# Altium PCB BT100_V1.1.PCBDOC
Units mm, origin at the board's own origin, x right, y up, seen from the top; angles counter-clockwise.
Board outline 126.04 x 85.33 mm, 4 copper layers (Top Layer, GND, POWER, Bottom Layer); 82 components, 62 nets, 257 pads, 111 vias.
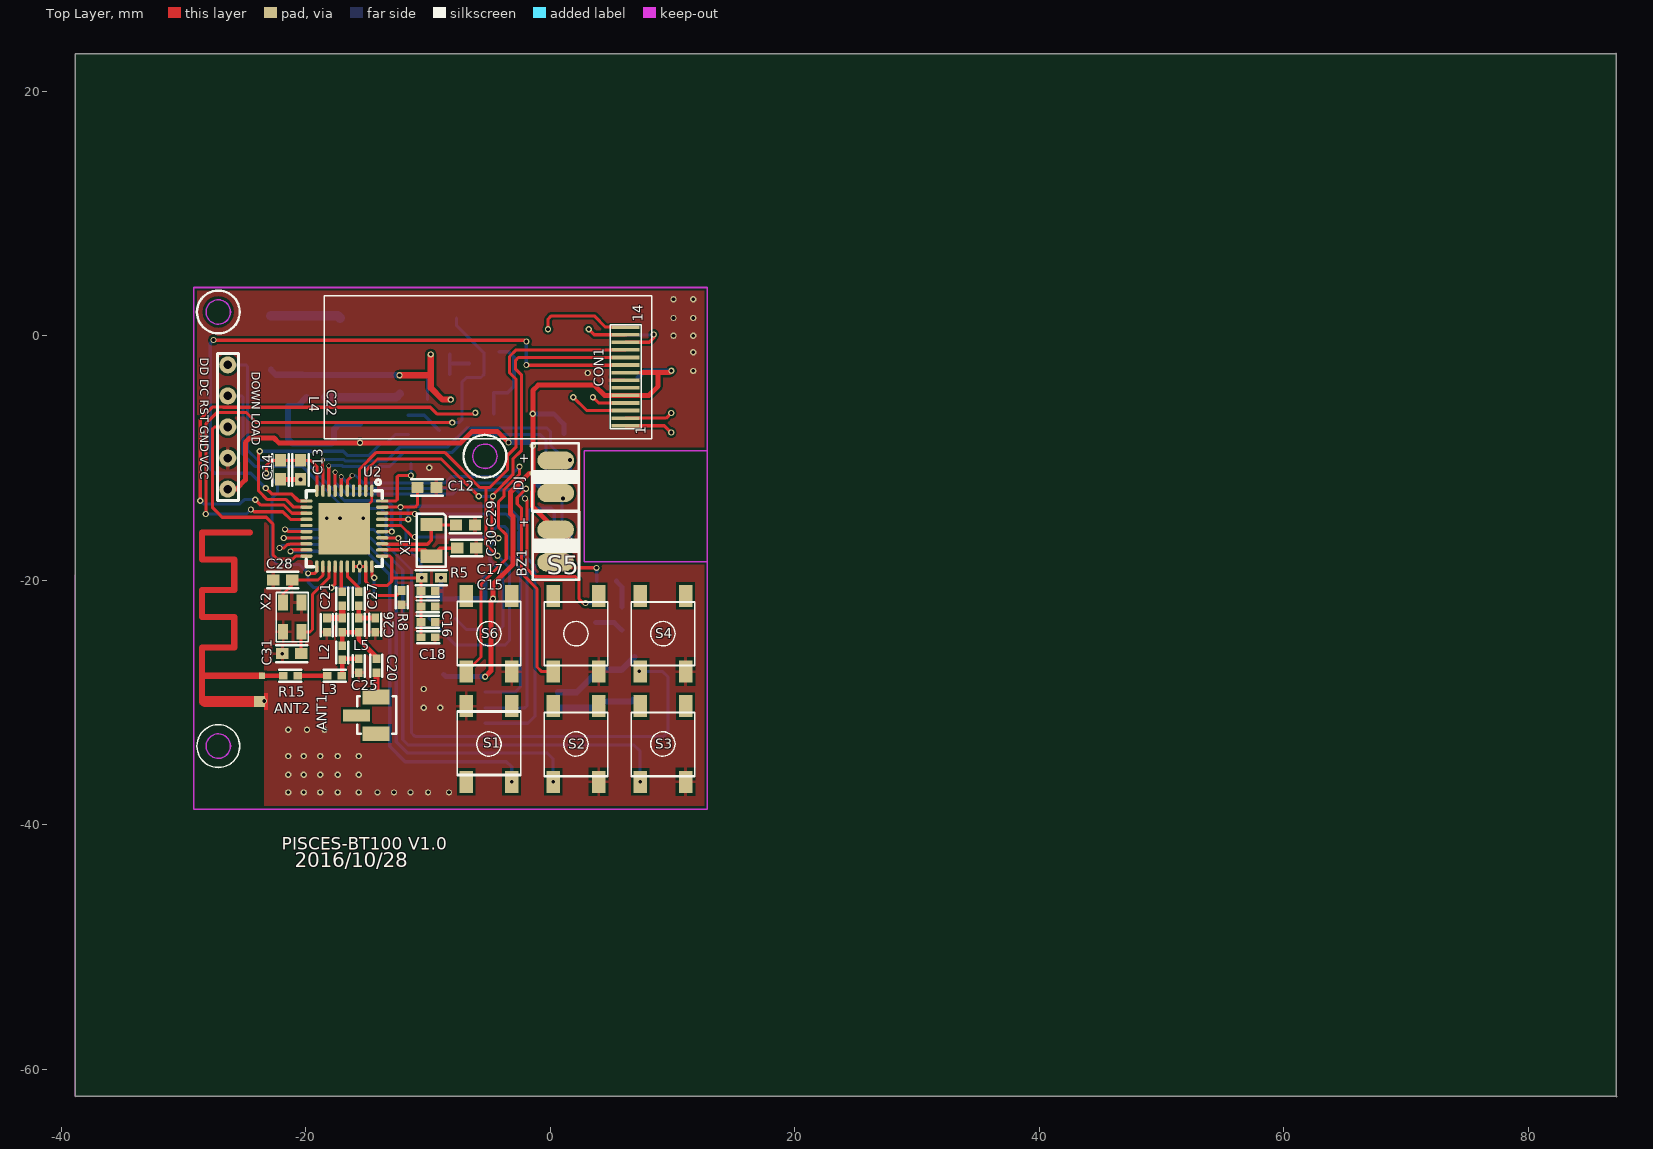
[diagram p0: Top Layer view]
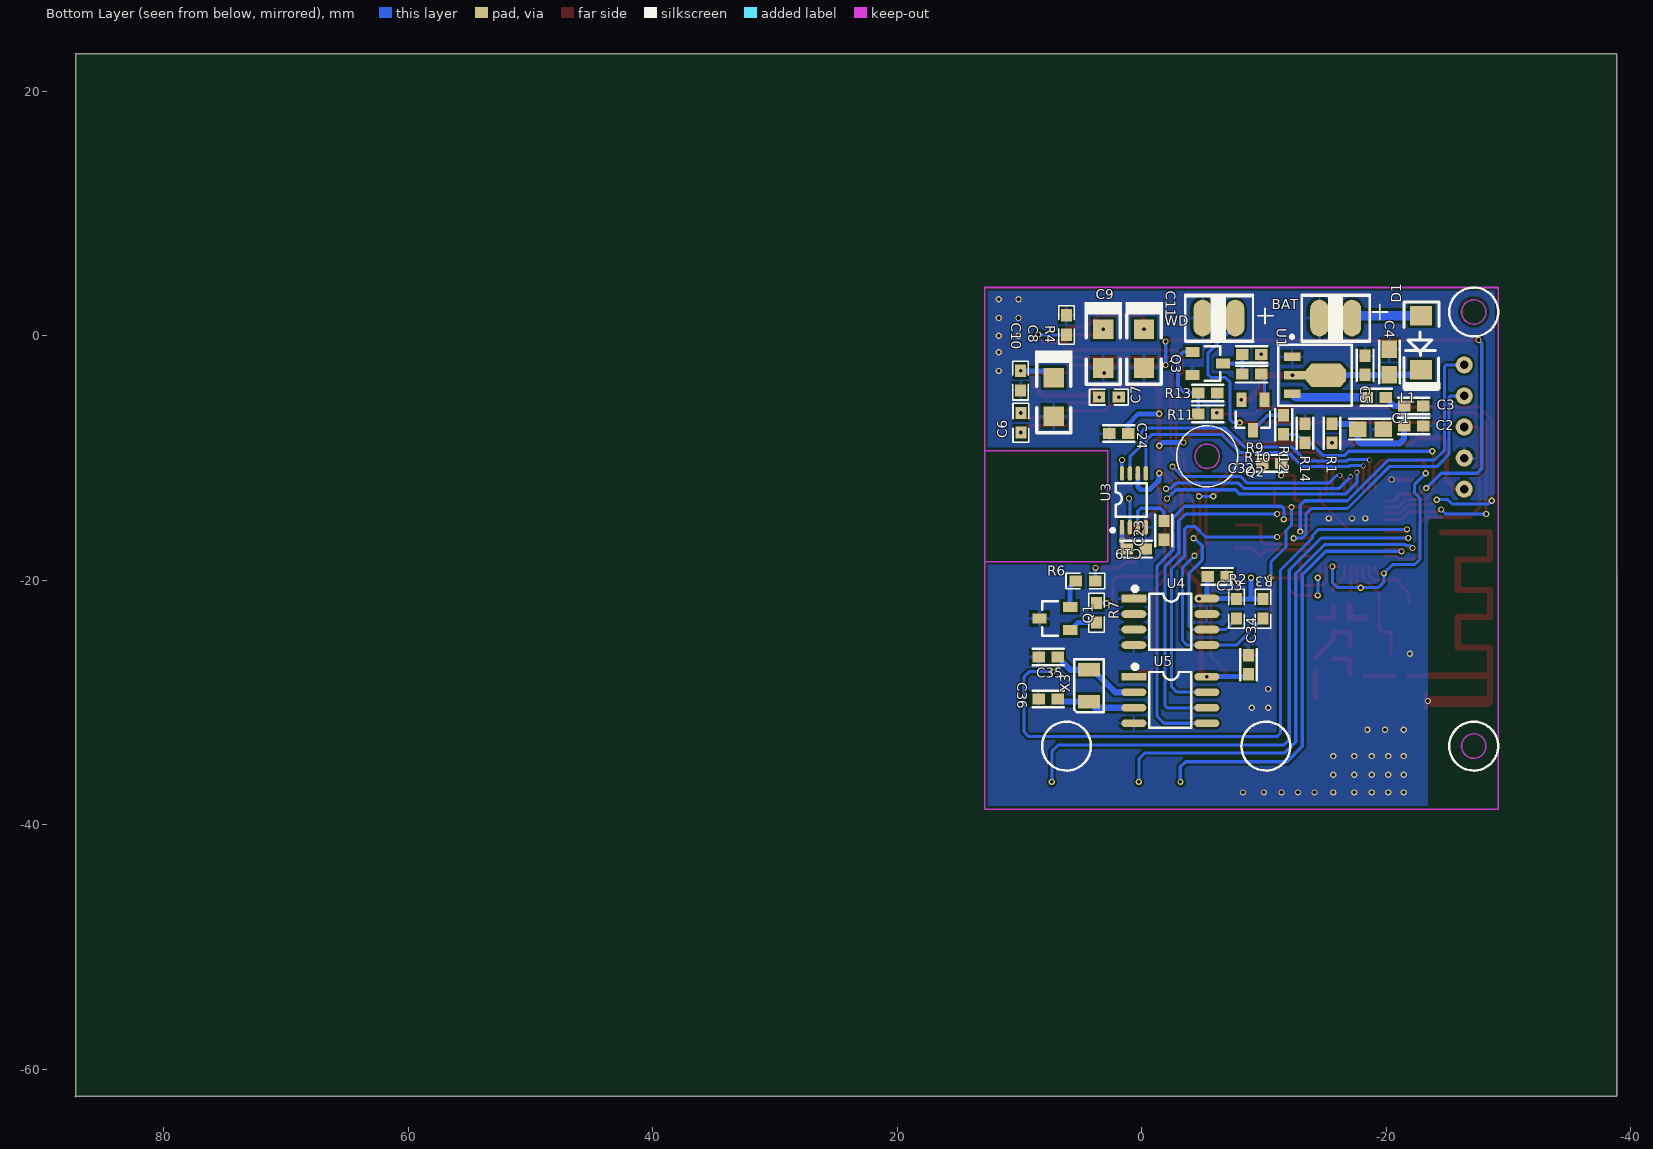
[diagram p1: Bottom Layer view, seen from below]

## Layer stack, top to bottom
Top Solder: solder mask 0.0102, Solder Resist, Dk 3.5
Top Layer: signal copper 0.0356
Dielectric1: core 0.32, FR-4, Dk 4.8
GND: signal copper 0.0356
Dielectric2: prepreg 0.32, FR-4, Dk 4.8
POWER: signal copper 0.0356
Dielectric3: core 0.32, FR-4, Dk 4.8
Bottom Layer: signal copper 0.0356
Bottom Solder: solder mask 0.0102, Solder Resist, Dk 3.5

## Board outline
-38.826,-62.183 -38.826,23.037 87.104,23.037 87.154,23.087 87.174,23.067 87.174,9.757 87.174,-62.213 87.204,-62.243 87.164,-62.203 -38.836,-62.203

## Design rules (kind name [scope] priority, off if disabled: settings)
Clearance [All] p1: gap=0.2
ComponentClearance [All] p1 off: gap=0.254 collisioncheckmode=3 verticalgap=0.254 showdistances=FALSE
FabricationTestPointUsage TestPointUsage [All] p1: valid=0 allowmultiple=FALSE
FabricationTestpoint Testpoint [(IsPad And (OnTopLayer Or OnBottomLayer))] p1: side=3 testpointundercomponent=TRUE minsize=1.016 maxsize=2.54 preferedsize=1.524 minholesize=0 maxholesize=1.016 preferedholesize=0.813 testpointgrid=0.025 allowsidetop=TRUE allowsidebottom=TRUE usegrid=TRUE gridtolerance=0
Height [All] p1 off: minheight=0 maxheight=25.4 prefheight=12.7
PolygonConnect PolygonConnect_1 [IsVia] p1: connectstyle=Direct reliefconductorwidth=0.254 reliefentries=4 polygonreliefangle="90 Angle" airgapwidth=0.254
PolygonConnect [All] p2: connectstyle=Relief reliefconductorwidth=0.254 reliefentries=4 polygonreliefangle="90 Angle" airgapwidth=0.254
RoomDefinition BT100_V1.1 [InComponentClass('BT100_V1.1')] p1: confinementstyle=ConfineIn formatcopy=TRUE lockcomponents=FALSE outline -67.875,-186.955 -17.075,-186.955 -17.075,-161.555 -67.875,-161.555
RoutingVias [All] p1: holewidth=0.4 width=0.7 viastyle="Through Hole" minholewidth=0.2 minwidth=0.2 maxholewidth=0.711 maxwidth=1.27
SolderMaskExpansion [All] p1: expansion=0.102
UnpouredPolygon [All] p1: allowunpoured=FALSE
Width [All] p1: maxlimit=1 minlimit=0.2 preferedwidth=0.28 midlayer1_minwidth=0.254 midlayer1_maxwidth=0.254 midlayer1_prefwidth=0.254 midlayer2_minwidth=0.254 midlayer2_maxwidth=0.254 midlayer2_prefwidth=0.254 minimp=50.000000 maximp=50.000000 favimp=50.000000
25 further rules are at their usual default settings.

## Components (designator, comment, footprint, x,y, rotation, side; value= is the part's Value field where it differs from the comment)
ANT1 "ANT" IPEX -15.84,-31.05 r180 top
ANT2 "ANT" ANT -23.58,-27.81 r90 top
BAT "CN1" 2PAD-9 -17.19,1.44 r0 bottom
BZ1 "BUZZER" 2PAD-9 0.445,-15.863 r270 top
C1 "10uf/10V,0805" PC5-*****-**-0A_0805_TDK -18.72,-7.65 r0 bottom
C2 "0.1uf" PC5-*****-**-0A_0603_TDK -22.23,-7.38 r0 bottom
C3 "2.2uf" PC5-*****-**-0A_0603_TDK -22.23,-5.76 r180 bottom
C4 "10uf/10V,0805" PC5-*****-**-0A_0805_TDK -20.25,-2.16 r270 bottom
C5 "0.1uf" PC5-*****-**-0A_0603_TDK -18.27,-2.43 r270 bottom
C6 "1UF" 0603 9.9,-7.92 r90 bottom
C7 "1UF" 0603 1.89,-5.04 r0 bottom
C8 "4.7UF" 3216C 7.196,-3.417 r90 bottom
C9 "4.7uf" 3216C 3.15,0.54 r90 bottom
C10 "1uf" 0603 9.9,-2.88 r270 bottom
C11 "4.7uF" 3216C -0.18,0.54 r90 bottom
C12 "1uf" PC5-*****-**-0A_0603_TDK -10.08,-12.42 r0 top
C13 "0.1uf" PC7-*****-KO-0A_0603_TDK -20.43,-10.98 r270 top
C14 "0.1uf" PC5-*****-**-0A_0603_TDK -22.05,-10.98 r270 top
C15 "0.1uf" PC7-*****-KQA0A_0402_YAGEO -9.99,-22.14 r0 top
C16 "0.1uf" PC7-*****-KQA0A_0402_YAGEO -9.99,-23.4 r0 top
C17 "0.1uf" PC7-*****-KQA0A_0402_YAGEO -9.99,-20.88 r0 top
C18 "220pf" PC7-*****-KQA0A_0402_YAGEO -9.99,-24.66 r180 top
C19 "1uf" PC5-*****-**-0A_0603_TDK 0.45,-17.46 r0 bottom
C20 "20P" PC7-*****-KQA0A_0402_YAGEO -14.22,-27 r270 top
C21 "18p" PC7-*****-KQA0A_0402_YAGEO -17.01,-21.51 r270 top
C22 "1p" PC7-*****-KQA0A_0402_YAGEO -17.01,-23.67 r270 top
C23 "1uf" PC5-*****-**-0A_0603_TDK -1.8,-15.93 r90 bottom
C24 "0.1uf" PC5-*****-**-0A_0603_TDK 1.89,-8.01 r180 bottom
C25 "1p" PC7-*****-KQA0A_0402_YAGEO -15.66,-27 r90 top
C26 "1p" PC7-*****-KQA0A_0402_YAGEO -14.31,-23.67 r270 top
C27 "18p" PC7-*****-KQA0A_0402_YAGEO -15.66,-21.51 r270 top
C28 "27p" PC7-*****-KO-0A_0603_TDK -21.87,-19.98 r0 top
C29 "15P" PC5-*****-**-0A_0603_TDK -6.93,-15.48 r180 top
C30 "15P" PC7-*****-KO-0A_0603_TDK -6.84,-17.37 r180 top
C31 "27p" PC7-*****-KO-0A_0603_TDK -21.15,-26.01 r0 top
C32 "1uf" PC5-*****-**-0A_0603_TDK -10.62,-10.44 r180 bottom
C33 "0.1uf" PC5-*****-**-0A_0603_TDK -6.18,-19.68 r0 bottom
C34 "0.1uf" PC7-*****-KO-0A_0603_TDK -8.73,-26.91 r90 bottom
C35 "15P" PC7-*****-KO-0A_0603_TDK 7.65,-26.28 r0 bottom
C36 "15P" PC7-*****-KO-0A_0603_TDK 7.65,-29.7 r0 bottom
CON1 "FPC-14PIN-F" FFC6214 6.16,-7.354 r90 top locked
D1 "SS12" SS12-DIDEO -22.86,1.62 r270 bottom
"DD DC RST GND VCC" "debugger" ISCP-5PIN -26.37,-7.47 r90 top
DJ "SIP2" 2PAD-9 0.45,-12.87 r90 top
L1 "BLM18HG102SN1" PC5-*****-**-0A_0603_TDK -19.17,-5.04 r180 bottom
L2 "1nH" PC5-*****-**-0A_0402_TDK -17.01,-25.92 r270 top
L3 "3nH" PC5-*****-**-0A_0402_TDK -17.64,-27.81 r180 top
L4 "2nH" PC5-*****-**-0A_0402_TDK -18.27,-23.67 r90 top
L5 "2nH" PC5-*****-**-0A_0402_TDK -15.66,-23.67 r270 top
Q1 "BC857C" PTR-C0025-00-2A_2SC1623 7.11,-23.13 r90 bottom
Q2 "BC857B" PTR-C0025-00-2A_2SC1623 -9.09,-6.48 r0 bottom
Q3 "BC847B" PTR-C0025-00-2A_2SC1623 -5.397,-2.274 r270 bottom
R1 "0ohm" PC5-*****-**-0A_0603_TDK -15.557,-7.989 r270 bottom
R2 "4.7K" 0603 -7.74,-23.13 r90 bottom
R3 "4.7K" 0603 -9.9,-23.13 r90 bottom
R4 "390K" 0603 6.16,1.663 r270 bottom
R5 "0ohm" PRC-*****-AM-0A_0603 -9.72,-19.8 r0 top
R6 "10Ω" 0603 5.4,-20.07 r180 bottom
R7 "1K" 0603 3.69,-21.87 r270 bottom
R8 "56k" PRC-*****-BM-0A_0402 -12.15,-21.42 r270 top
R9 "47K" PC7-*****-KO-0A_0603_TDK -9,-1.53 r180 bottom
R10 "30K" PC5-*****-**-0A_0603_TDK -9,-3.15 r180 bottom
R11 "4.7K" PC5-*****-**-0A_0603_TDK -5.4,-6.39 r0 bottom
R12 "75K" PC5-*****-**-0A_0603_TDK -11.61,-7.29 r90 bottom
R13 "100K" PC5-*****-**-0A_0603_TDK -5.4,-4.68 r0 bottom
R14 "30K" PC5-*****-**-0A_0603_TDK -13.346,-7.983 r270 bottom
R15 "0ohm" PC7-*****-KQA0A_0402_YAGEO -21.24,-27.81 r0 top
S1 "SW-PB" TS-030 -5.016,-33.389 r270 top
S2 "SW-PB" TS-030 2.096,-33.389 r90 top
S3 "SW-PB" TS-030 9.208,-33.389 r90 top
S4 "SW-PB" TS-030 9.208,-24.372 r90 top
S5 "SW-PB" TS-030 2.096,-24.372 r90 top
S6 "SW-PB" TS-030 -5.016,-24.372 r90 top
U1 "HT7333" SOT89 -13.68,-3.24 r270 bottom
U2 "CC2541" CC2530_QFN40 -14.58,-12.69 r270 top
U3 "PT5102" PT5102 1.62,-15.66 r90 bottom
U4 "AT24C64N" PIC-00570-40-2A_93LC46B -2.34,-23.4 r180 bottom
U5 "DS1302Z" PIC-00570-40-2A_93LC46B -2.34,-29.79 r180 bottom
WD "CN1" 2PAD-9 -7.65,1.44 r0 bottom
X1 "32.768KHZ,F=12.5P" FC-135 -9.72,-16.74 r270 top
X2 "CY_3225" CY_3225 -21.42,-24.12 r90 top
X3 "32.768KHZ,F=6P" FC-135 4.32,-28.62 r90 bottom

## Footprints (in the part's own frame and the unit in brackets; to place one, negate y for a bottom-side part, rotate by r counter-clockwise, add the part's x,y. Pads: shape width x height; smd on the part's side, far side on the other; paste and mask are expansions set on the pad)
2PAD-9 [mm]
  oval 1.5x3 smd: 1(0,0) 2(2.667,0)
  silkscreen extent -1.47,-1.89 4.09,1.92
0603 [mm]
  rect 1x0.9 smd: 1(-0.005,-0.007) 2(1.595,-0.007)
  silkscreen extent -0.79,-0.64 2.38,0.63
3216C [mm]
  rect 1.6x1.65 smd: 1(-0.009,-0.005) 2(-3.184,-0.005)
  silkscreen extent -4.52,-1.54 2.21,1.52
ANT [mm]
  rect 0.5x0.5 smd: 1(0,0)
  rect 0.9x0.9 smd: 2(-2.1,0.2)
  Top Layer lines w0.5: -2.26,4.79 -2.21,4.84 -2.15,4.9 0,4.9 ; 11.7,0.96 11.7,4.9 9.5,4.9 9.5,2.26 7,2.26 7,4.9 4.8,4.9 4.8,2.26 2.3,2.26 2.3,4.9 0,4.9 ; 0,0 0,4.9
  Top Layer lines w0.9: -2.1,4.65 -2.1,0.2
CC2530_QFN40 [mm]
  oval 1x0.28 smd: 1(-0.011,-0.009) 2(-0.011,-0.509) 3(-0.011,-1.009) 4(-0.011,-1.509) 5(-0.011,-2.009) 6(-0.011,-2.509) 7(-0.011,-3.009) 8(-0.011,-3.509) 9(-0.011,-4.009) 10(-0.011,-4.509) 21(6.189,-4.509) 22(6.189,-4.009) 23(6.189,-3.509) 24(6.189,-3.009) 25(6.189,-2.509) 26(6.189,-2.009) 27(6.189,-1.509) 28(6.189,-1.009) 29(6.189,-0.509) 30(6.189,-0.009)
  oval 0.28x1 smd: 11(0.832,-5.359) 12(1.332,-5.359) 13(1.832,-5.359) 14(2.332,-5.359) 15(2.832,-5.359) 16(3.332,-5.359) 17(3.832,-5.359) 18(4.332,-5.359) 19(4.832,-5.359) 20(5.332,-5.359) 31(5.332,0.841) 32(4.832,0.841) 33(4.332,0.841) 34(3.832,0.841) 35(3.332,0.841) 36(2.832,0.841) 37(2.332,0.841) 38(1.832,0.841) 39(1.332,0.841) 40(0.832,0.841)
  rect 4.2x4.2 smd: 41(3.089,-2.259)
  silkscreen extent -0.91,-5.37 6.21,0.85
CY_3225 [mm]
  round 0.5 on Top Overlay: 0(-0.64,-2.06)
  rect 1.3x0.8 smd: 1(-0.095,-1.07) 2(2.293,-1.07) 3(2.293,0.428) 4(-0.095,0.428)
  silkscreen extent -0.91,-1.63 3.11,0.99
FC-135 [mm]
  rect 1.1x1.8 smd: 1(-1.3,0) 2(1.3,0)
  silkscreen extent -2.17,-1.2 2.15,1.19
FFC6214 [mm]
  rect 0.3x2.3 smd: 1(-0.009,0.01) 2(0.611,0.01) 3(1.231,0.01) 4(1.851,0.01) 5(2.471,0.01) 6(3.091,0.01) 7(3.711,0.01) 8(4.331,0.01) 9(4.951,0.01) 10(5.571,0.01) 11(6.191,0.01) 12(6.811,0.01) 13(7.431,0.01) 14(8.051,0.01)
IPEX [mm]
  rect 2.2x1 smd: 1(0,0)
  rect 2.2x1.2 smd: 2(-1.6,-1.5) 3(-1.6,1.49)
  silkscreen extent -3.24,-1.56 -0.05,1.51
ISCP-5PIN [mm]
  round 1.4 hole 0.7: 1(-5.08,0) 2(-2.54,0) 3(0,0) 4(2.54,0) 5(5.08,0)
  silkscreen extent -6.01,-0.89 6.01,0.84
PC5-*****-**-0A_0402_TDK [mm] "0402"
  rect 0.7x0.65 smd: 1(-0.58,0) 2(0.58,0)
  silkscreen extent -0.91,-0.48 0.89,0.48
PC5-*****-**-0A_0603_TDK [mm] "0603"
  rect 1.016x0.9 smd: 1(-0.775,0) 2(0.776,0)
  silkscreen extent -1.28,-0.68 1.28,0.68
PC5-*****-**-0A_0805_TDK [mm] "0805"
  rect 1.424x1.27 smd: 1(-1.04,0) 2(1.04,0)
  silkscreen extent -1.75,-0.84 1.75,0.84
PC7-*****-KO-0A_0603_TDK [mm] "0603"
  rect 1.016x0.9 smd: 1(-0.776,0) 2(0.776,0)
  silkscreen extent -1.28,-0.68 1.28,0.68
PC7-*****-KQA0A_0402_YAGEO [mm] "0402"
  rect 0.7x0.65 smd: 1(-0.58,0) 2(0.58,0)
  silkscreen extent -0.91,-0.48 0.89,0.48
PIC-00570-40-2A_93LC46B [mil] "SOIC-8"
  rect 80x25 smd: 1(-117.5,75)
  oval 80x25 smd: 2(-117.5,25) 3(-117.5,-25) 4(-117.5,-75) 5(117.5,-75) 6(117.5,-25) 7(117.5,25) 8(117.5,75)
  silkscreen extent -119,-90 67,111
PRC-*****-AM-0A_0603 [mm] "0603"
  rect 0.966x0.762 smd: 1(-0.785,0) 2(0.785,0)
  silkscreen extent -1.26,-0.6 1.27,0.6
PRC-*****-BM-0A_0402 [mm] "0402"
  rect 0.7x0.65 smd: 1(-0.58,0) 2(0.58,0)
  silkscreen extent -0.91,-0.48 0.89,0.48
PT5102 [mm]
  rect 1.2x0.35 smd: 1(0,0)
  oval 1.2x0.35 smd: 2(-0.006,-0.65) 3(-0.006,-1.3) 4(-0.006,-1.95) 5(4.4,-1.95) 6(4.4,-1.3) 7(4.4,-0.65) 8(4.4,0)
  silkscreen extent -0.38,-2.03 3.58,0.89
PTR-C0025-00-2A_2SC1623 [mm]
  rect 0.816x1.174 smd: B(-0.95,-1.25) C(0,1.251) E(0.95,-1.25)
  silkscreen extent -1.4,-0.26 1.4,1.04
SOT89 [mm] "SOT-89; Body 4.6 x 4.25 mm, inc. leads (LxW max)"
  rect 0.7x1.35 smd: 1(-1.5,-1.388) 3(1.5,-1.388)
  rect 0.7x1.8 smd: 2(0,-1.162)
  oct 1.9x3.3 smd: 2(0,1.388)
  silkscreen extent -3.27,-2.51 2.5,3.49
SS12-DIDEO [mm]
  rect 1.6x1.8 smd: 1(4.41,-0.01) 2(-0.01,-0.01)
  silkscreen extent -1.14,-1.43 6.03,1.44
TS-030 [mm]
  rect 1.8x1.1 smd: 1(-3.099,1.854) 2(-3.099,-1.854) 3(3.099,-1.854) 4(3.099,1.854)
  silkscreen extent -2.6,-2.6 2.6,2.6

## Part data
ANT1: library part ANT1
BAT DJ WD: library part CON2, "Connector"
BZ1: "Buzzer"
C1 C2 C3 C4 C5 C12 C13 C14 C15 C16 C17 C18 C19 C20 C21 C22 C23 C24 C25 C26 C27 C28 C29 C30 C31 C32 C33 C34 C35 C36: library part PC7_0402_YAGEO, "PC7-*****-KQA0A"
C6 C7: library part "CAP NP_Dup3"
C8 C9 C11: library part CAP_E, "1206"
C10: library part CAP, "Capacitor"
CON1: library part CON14, "Connector"
D1: library part PDD_SD101CWS, "PDD-00330-00-2A"
"DD DC RST GND VCC": library part CON5
L1 L2 L3 L4 L5: library part PWL_18nH, "PWL-00195-00-20"
Q1: library part PNP, "PNP Transistor"
Q2: library part PTR-PNP
Q3: library part PTR_2SC3356, "PTR-C0028-00-2A"
R1 R5 R8 R9 R10 R11 R12 R13 R14: library part PRC_0603, "PRC-*****-AM-0A_0603"
R2 R3 R4: library part RES
R6 R7 R15: library part R_Dup3
U1: library part LM117K
U3: library part Component_1_1
U5: library part DS1302
X1: library part CRYSTAL, "Crystal"
X3: library part PTR_16MHZ, "PTR-X0320-20-2A"

## Via types
v1: diameter 0.508, hole 0.3, Top Layer to Bottom Layer, 106 vias
v2: diameter 0.4, hole 0.3, Top Layer to Bottom Layer, 5 vias

## Nets (pads, with @x,y where several pads share a name; then routed paths per layer and width w, separated by ;. In a path a pad name is that pad's centre, name@x,y a point inside that pad or via, vN(x,y) a via of type N, cw(c..) or ccw(c..) an arc to the next point about the centre after c; other vN are vias at no path point)
AD: R12.1 R14.2 U2.12 | length 20.8
  Top Layer w0.25: v1(-23.76,-9.45) -23.85,-9.54 -23.85,-12.69 -23.13,-13.41 -21.594,-13.41 -21.504,-13.5 -21.497,-13.5 -20.975,-14.022 U2.12
  Bottom Layer w0.25: v1(-23.76,-9.45) -16.92,-9.45 -16.56,-9.81 -14.85,-9.81 -13.799,-8.759 R14.2 -12.653,-8.065 R12.1
DC: "DD DC RST GND VCC.4" U2.34 | length 23.8
  Top Layer w0.25: U2.34 -13.702,-16.56 v1(-12.42,-16.56)
  Bottom Layer w0.25: -26.37,-4.93 -25.22,-4.93 -25.11,-5.04 -25.11,-9.72 -24.12,-10.71 -20.25,-10.71 -16.83,-14.13 -13.86,-14.13 -13.441,-14.549 -13.441,-16.221 -13.102,-16.56 v1(-12.42,-16.56)
DD: "DD DC RST GND VCC.5" U2.35 | length 25.1
  Top Layer w0.25: U2.35 v1(-12.962,-16.022)
  Bottom Layer w0.25: -26.37,-2.39 -24.88,-2.39 -24.75,-2.52 -24.75,-9.36 -23.94,-10.17 -20.16,-10.17 -16.83,-13.5 -13.32,-13.5 -12.962,-13.858 v1(-12.962,-16.022)
DJ1: U2.8 U3.5 | length 23.8
  Top Layer w0.25: v2(-18.114,-10.644) -18.114,-12.654 U2.8
  Bottom Layer w0.25: v2(-18.114,-10.644) -18.105,-10.635 -17.008,-10.635 -16.933,-10.71 -13.14,-10.71 -11.97,-9.54 -8.01,-9.54 -6.57,-8.1 -0.81,-8.1 -0.33,-8.58 U3.5
DJ2: U2.9 U3.7 | length 26.3
  Top Layer w0.25: v2(-18.639,-10.17) -18.639,-10.862 -18.589,-10.912 U2.9
  Bottom Layer w0.25: v2(-18.639,-10.17) -18.589,-10.119 -16.887,-10.119 -16.746,-10.26 -13.43,-10.26 -12.26,-9.09 -8.37,-9.09 -6.84,-7.56 -0.27,-7.56 0.02,-7.85 0.02,-8.95 0.97,-9.9 U3.7
GND: "DD DC RST GND VCC.2" ANT2.2 BAT.2 C1.1 C2.1 C3.2 C4.1 C5.1 C8.2 C9.2 C10.2 C11.2 C12.2 C13.2 C14.2 C15.2 C16.2 C17.2 C18.1 C19.1 C23.1 C24.1 C25.1 C26.2 C28.1 C29.1 C30.1 C31.1 C32.1 C33.1 C34.2 C35.2 C36.2 CON1.7 L4.1 Q1.C Q3.E R4.1 R8.2 R13.1 R14.1 S1.2 S2.2 S3.2 S4.2 S5.2 S6.2 U1.1 U2.1 U2.41 U3.4 U4.1 U4.2 U4.3 U4.4 U4.7 U5.4 WD.2 X2.2 X2.4 | length 5.7
  Top Layer w0.2: U2.41 -14.589,-13.529 U2.1
  Top Layer w0.4: C14.2 v1(-20.43,-11.756)
  other v1: -21.42,-37.35 -20.16,-37.35 -18.81,-37.35 -17.37,-37.35 -15.66,-37.35 -14.13,-37.35 -12.78,-37.35 -11.43,-37.35 -9.99,-37.35 -8.28,-37.35 -21.42,-35.91 -20.16,-35.91 -18.81,-35.91 -17.37,-35.91 -15.66,-35.91 -21.42,-34.38 -20.16,-34.38 -18.81,-34.38 -17.37,-34.38 -15.66,-34.38 -21.42,-32.22 -19.89,-32.22 -18.45,-32.22 -10.35,-30.42 -9,-30.42 -23.4,-29.88 -10.35,-28.89 -21.926,-26.01 -18.27,-14.94 -17.19,-14.94 -15.3,-14.94 -9.9,-10.8 3.06,-3.06 11.7,-2.88 11.7,-1.35 10.08,0 11.7,0 10.08,1.44 11.7,1.44 10.08,2.97 11.7,2.97
LCDRES: CON1.9 U2.11 | length 55.3
  Top Layer w0.28: v1(-27.54,-0.36) -2.07,-0.36 v1(-1.953,-0.477) ; v1(-23.265,-12.465) -22.785,-12.945 -21.165,-12.945 -20.588,-13.522 U2.11 ; v1(-1.953,-2.403) CON1.9
  Bottom Layer w0.28: v1(-27.54,-0.36) -27.81,-0.63 -27.81,-10.89 -27.45,-11.25 -24.48,-11.25 v1(-23.265,-12.465) ; v1(-1.953,-2.403) v1(-1.953,-0.477)
MODE-SW: U2.14 WD.1 | length 48.4
  Top Layer w0.25: v1(-28.17,-14.58) -28.141,-14.551 -28.141,-7.171 -27.27,-6.3 -24.84,-6.3 -24.03,-7.11 v1(-8.01,-7.11) ; v1@-24.39,-14.22 -24.21,-14.4 -21.87,-14.4 -21.248,-15.022 U2.14
  Bottom Layer w0.25: v1(-28.17,-14.58) -24.84,-14.58 v1(-24.48,-14.22) ; v1(-8.01,-7.11) -7.47,-7.11 -7.2,-6.84 -7.2,-3.78 -6.84,-3.42 -5.67,-3.42 -5.4,-3.15 -5.4,-1.44 -7.65,0.81 WD.1
NetANT1_2: ANT1.2 C20.2 | length 2
  Top Layer w0.5: ANT1.2 -14.22,-29.53 C20.2
NetANT2_1: ANT2.1 R15.1 | length 1.8
  Top Layer w0.4: ANT2.1 R15.1
NetBAT_1: BAT.1 D1.2 | length 5.7
  Bottom Layer w0.8: D1.2 -17.38,1.63 BAT.1
NetBZ1_2: BZ1.2 R6.2 | length 4.6
  Top Layer w0.3: BZ1.2 1.34,-18.53 1.8,-18.99 v1(3.78,-18.99)
  Bottom Layer w0.3: v1(3.78,-18.99) 3.805,-19.015 R6.2
NetC1_2: C1.2 C2.2 C3.1 L1.2 R1.1 | length 11.7
  Bottom Layer w0.5: L1.2 -20.666,-5.76 C3.1 C2.2 -21.454,-8.426 -21.06,-8.82 -17.91,-8.82 -17.68,-8.59 C1.2 -17.244,-7.214 R1.1
NetC6_1: C6.1 CON1.1 | length 4
  Top Layer w0.254: CON1.1 9.33,-7.363 v1(9.893,-7.925)
NetC6_2: C6.2 CON1.2 | length 3.9
  Top Layer w0.254: CON1.2 9.476,-6.743 v1(9.893,-6.325)
NetC7_1: C7.1 CON1.3 | length 4.7
  Top Layer w0.254: v1(1.885,-5.033) 2.975,-6.123 CON1.3
NetC7_2: C7.2 CON1.4 | length 2.9
  Top Layer w0.254: v1(3.485,-5.033) 3.954,-5.503 CON1.4
NetC9_1: C9.1 CON1.13 | length 3.2
  Top Layer w0.3: v1(3.145,0.531) 3.599,0.077 CON1.13
NetC11_1: C11.1 CON1.14 | length 7.6
  Top Layer w0.254: v1(-0.185,0.531) -0.185,1.345 0.09,1.62 3.6,1.62 4.523,0.697 CON1.14
NetC12_1: C12.1 C13.1 C14.1 C15.1 C16.1 C17.1 C18.2 R5.1 U2.10 U2.21 U2.24 U2.27 U2.28 U2.29 U2.31 U2.39 | length 53.4
  Top Layer w0.25: v1(-23.22,-11.25) -23.22,-10.62 -22.805,-10.205 C14.1 -20.88,-10.205 -19.585,-10.205 -19.089,-10.701 U2.10 ; v1(-19.8,-19.44) -19.26,-19.44 -19.089,-19.269 U2.21 ; v1(-17.91,-20.61) -17.589,-20.289 U2.24 ; U2.27 v1(-15.589,-18.879) U2.29 -15.089,-20.101 -14.76,-20.43 -13.32,-20.43 -12.96,-20.07 -12.96,-19.8 ; U2.31 -13.118,-18.022 -12.96,-18.18 -12.96,-19.8 ; U2.39 -11.052,-14.022 -10.855,-13.825 C12.1 ; C18.2 C15.1 C17.1 -10.57,-19.865 v1(-10.505,-19.8) -12.96,-19.8
  Bottom Layer w0.25: v1(-23.22,-11.25) -22.32,-12.15 -22.32,-12.87 -22.77,-13.32 -22.77,-18.27 -22.32,-18.72 -20.52,-18.72 v1(-19.8,-19.44) -19.8,-20.16 -19.35,-20.61 -16.02,-20.61 -15.589,-20.179 v1(-15.589,-18.879) ; v1(-12.24,-14.022) -12.24,-15.48 -11.79,-15.93 -11.79,-17.28 -10.57,-18.5 -10.57,-19.735 v1(-10.505,-19.8)
NetC20_1: C20.1 C22.2 L2.1 L5.2 | length 5.2
  Top Layer w0.4: L2.1 C22.2 L5.2 -15.66,-24.84 -14.22,-26.28 C20.1
NetC21_1: C21.1 U2.25 | length 2.1
  Top Layer w0.25: U2.25 -17.089,-20.851 C21.1
NetC21_2: C21.2 C22.1 L4.2 | length 2.3
  Top Layer w0.5: L4.2 C22.1 C21.2
NetC23_2: C23.2 U3.3 | length 4.4
  Bottom Layer w0.28: C23.2 -1.8,-14.4 -1.53,-14.13 0.09,-14.13 0.32,-14.36 U3.3
NetC25_2: C25.2 L2.2 L3.1 | length 2.7
  Top Layer w0.4: L3.1 -17.01,-27.76 L2.2 -16.93,-26.42 C25.2
NetC26_1: C26.1 C27.2 L5.1 | length 2.4
  Top Layer w0.4: C27.2 L5.1 C26.1
NetC27_1: C27.1 U2.26 | length 2.4
  Top Layer w0.25: U2.26 -16.589,-19.681 -15.66,-20.61 C27.1
NetC28_2: C28.2 U2.22 X2.3 | length 5.5
  Top Layer w0.25: X2.3 -21.848,-21.128 -21.094,-20.374 C28.2 -18.99,-19.98 -18.589,-19.579 U2.22
NetC29_2: C29.2 U2.33 X1.1 | length 7.5
  Top Layer w0.28: U2.33 -13.708,-17.054 -10.036,-17.054 -9.72,-16.738 X1.1 -9.68,-15.48 C29.2
NetC30_2: C30.2 U2.32 X1.2 | length 6.6
  Top Layer w0.28: U2.32 -10.238,-17.522 X1.2 -9.05,-17.37 C30.2
NetC31_2: C31.2 U2.23 X2.1 | length 8.5
  Top Layer w0.25: C31.2 -20.375,-24.24 -19.65,-24.24 -19.44,-24.03 -19.44,-21.15 -18.089,-19.799 U2.23
NetC32_2: C32.2 U2.40 | length 5.3
  Top Layer w0.25: U2.40 -12.622,-13.522 -12.51,-13.41 -12.51,-11.52 -12.42,-11.43 v1(-11.396,-11.43)
  Bottom Layer w0.25: v1(-11.396,-11.43) C32.2
NetC35_1: C35.1 U5.2 X3.2 | length 7.4
  Bottom Layer w0.5: U5.2 2.165,-29.155 4,-27.32 X3.2 5.834,-27.32 C35.1
NetC36_1: C36.1 U5.3 X3.1 | length 6.5
  Bottom Layer w0.5: U5.3 3.815,-30.425 X3.1 6.654,-29.92 C36.1
NetCON1_12: CON1.12 R4.2 | length 5
  Top Layer w0.254: CON1.12 8.097,-0.543 8.46,-0.18 v1(8.46,0.09)
  Bottom Layer w0.254: R4.2 8.438,0.068 v1(8.46,0.09)
NetL1_1: L1.1 U1.3 | length 6.2
  Bottom Layer w0.7: L1.1 -12.592,-5.04 U1.3
NetL3_2: L3.2 R15.2 | length 2.4
  Top Layer w0.4: R15.2 L3.2
NetQ1_B: Q1.B R7.2 | length 2.4
  Bottom Layer w0.4: R7.2 5.244,-23.465 Q1.B
NetQ1_E: Q1.E R6.1 | length 2.3
  Bottom Layer w0.4: R6.1 5.86,-20.531 Q1.E
NetQ2_B: Q2.B R10.2 | length 2.2
  Bottom Layer w0.25: Q2.B -10.04,-3.414 R10.2
NetQ2_C: Q2.C R12.2 | length 3
  Bottom Layer w0.3: R12.2 -10.306,-6.514 Q2.C
NetQ3_B: Q3.B R11.2 R13.2 | length 7.3
  Bottom Layer w0.3: R11.2 R13.2 -3.51,-4.68 -2.97,-4.14 -2.97,-1.769 -3.415,-1.324 Q3.B
NetQ3_C: Q3.C R9.1 R10.1 | length 3.2
  Bottom Layer w0.3: R10.1 -8.225,-2.25 ; R9.1 -8.225,-2.25 ; Q3.C -8.2,-2.274 -8.225,-2.25
NetR8_1: R8.1 U2.30 | length 4.9
  Top Layer w0.25: U2.30 -14.589,-19.701 -14.49,-19.8 v1(-14.4,-19.8) ; v1(-14.4,-21.24) -12.55,-21.24 R8.1
  Bottom Layer w0.25: v1(-14.4,-21.24) v1(-14.4,-19.8)
O1: DJ.1 U3.2 | length 2.4
  Bottom Layer w0.254: U3.2 0.97,-13.39 v1(1.04,-13.32)
O2: DJ.2 U3.8 | length 1.1
  Bottom Layer w0.28: U3.8 v1(1.62,-10.17)
P10: R11.1 U2.13 | length 39.2
  Top Layer w0.25: v1(-28.62,-13.5) -28.62,-6.84 -27.63,-5.85 -26.758,-5.85 -26.753,-5.855 -9.805,-5.855 -9.27,-6.39 v1@-6.175,-6.39 ; v1(-24.12,-13.41) -23.67,-13.86 -21.78,-13.86 -21.69,-13.95 -21.684,-13.95 -21.111,-14.522 U2.13 U2.13@-19.96,-14.543
  Bottom Layer w0.25: v1(-28.62,-13.5) -28.35,-13.77 -25.38,-13.77 -25.02,-13.41 v1(-24.12,-13.41)
  other v1: -6.12,-6.3
RST: "DD DC RST GND VCC.3" U2.20 | length 18.7
  Top Layer w0.25: -26.37,-7.47 -27.45,-7.47 -27.63,-7.65 -27.63,-14.04 -26.82,-14.85 -23.22,-14.85 -22.68,-15.39 -22.68,-17.91 -22.32,-18.27 -21.051,-18.27 -20.804,-18.022 U2.20
S1: S1.4 U2.19 | length 36.2
  Top Layer w0.28: v1(-21.24,-17.64) -21.122,-17.522 U2.19
  Bottom Layer w0.28: v1(-21.24,-17.64) -15.058,-17.64 -13.14,-19.558 -13.14,-33.57 -11.88,-34.83 -3.6,-34.83 -3.162,-35.268 v1(-3.162,-36.488)
S2: S2.1 U2.18 | length 42.1
  Top Layer w0.25: v1(-22.14,-17.37) -21.789,-17.37 -21.48,-17.061 -21.338,-17.061 -21.3,-17.022 U2.18
  Bottom Layer w0.25: v1(-22.14,-17.37) -21.931,-17.161 -21.58,-17.161 -21.48,-17.061 -14.979,-17.061 -12.591,-19.449 -12.591,-33.219 -11.7,-34.11 -0.27,-34.11 0.242,-34.622 v1(0.242,-36.488)
S3: S3.1 U2.17 | length 48.8
  Top Layer w0.25: v1(-21.786,-16.548) -19.965,-16.548 U2.17
  Bottom Layer w0.25: v1(-21.786,-16.548) -14.682,-16.548 -12.06,-19.17 -12.06,-33.03 -11.61,-33.48 6.84,-33.48 7.354,-33.994 v1(7.354,-36.488)
S4: S4.1 U2.16 | length 55.2
  Top Layer w0.25: v1(-21.69,-15.84) -21.6,-15.84 -21.418,-16.022 U2.16
  Bottom Layer w0.25: v1(-21.69,-15.84) -14.456,-15.84 -13.96,-16.336 -13.96,-16.55 -11.34,-19.17 -11.34,-32.49 -11.07,-32.76 9.27,-32.76 9.63,-32.4 9.63,-27.9 9.201,-27.471 v1@7.354,-27.471
  other v1: 7.29,-27.45
S5: S5.1 U2.6 | length 34.1
  Top Layer w0.25: U2.6 v2(-17.089,-11.531) ; v1(-1.98,-12.51) -2.7,-13.23 -2.7,-13.77 -2.34,-14.13 -2.34,-19.44 -1.08,-20.7 -1.08,-27.09 -0.699,-27.471 S5.1
  Bottom Layer w0.25: v2(-17.089,-11.531) -16.11,-12.51 -8.37,-12.51 -7.92,-12.06 -2.79,-12.06 -2.34,-12.51 v1(-1.98,-12.51)
S6: S6.1 U2.5 | length 35
  Top Layer w0.25: U2.5 -16.589,-11.849 -16.2,-11.46 v2(-16.2,-11.43) ; S6.1 -5.67,-26.271 -5.67,-20.34 -3.6,-18.27 -3.6,-16.29 -4.23,-15.66 -4.23,-13.59 -3.78,-13.14 -3.78,-12.6 -2.52,-11.34 v1(-2.52,-10.71)
  Bottom Layer w0.25: v2(-16.2,-11.43) -15.93,-11.43 -15.3,-12.06 -8.64,-12.06 -8.1,-11.52 -3.33,-11.52 v1(-2.52,-10.71)
SCL: CON1.10 R2.1 U2.2 U4.6 | length 51.1
  Top Layer w0.254: U2.2 -15.089,-11.039 -14.13,-10.08 -8.91,-10.08 v1(-5.85,-13.14) ; v1(-4.23,-16.56) -4.77,-16.02 -4.77,-13.23 v1(-4.68,-13.14) -4.68,-13.002 -3.06,-11.382 -3.06,-10.08 -2.34,-9.36 -2.34,-3.24 -2.835,-2.745 -2.835,-2.008 -2.61,-1.783 CON1.10
  Bottom Layer w0.254: R2.1 -6.847,-24.035 U4.6 -4.145,-24.035 -3.87,-23.76 -3.87,-19.44 -4.95,-18.36 -4.95,-17.19 -4.32,-16.56 v1(-4.23,-16.56) ; v1(-5.85,-13.14) v1(-4.68,-13.14)
SDA: CON1.11 R3.1 U2.3 U4.5 | length 56.7
  Top Layer w0.25: U2.3 -15.589,-10.909 -14.22,-9.54 -8.64,-9.54 -5.76,-12.42 -5.22,-12.42 ; v1(-4.32,-18) -5.249,-17.071 -5.249,-12.449 -5.22,-12.42 ; CON1.11 -2.783,-1.163 -3.33,-1.71 -3.33,-3.042 -2.79,-3.582 -2.79,-9.09 -3.51,-9.81 -3.51,-10.98 -4.95,-12.42 -5.22,-12.42
  Bottom Layer w0.25: R3.1 -7.737,-25.305 U4.5 -3.705,-25.305 -3.33,-24.93 -3.33,-18.99 v1(-4.32,-18)
SPK_PD0: R7.1 U2.7 | length 32.2
  Top Layer w0.25: U2.7 v2(-17.589,-11.16) ; v1(-2.07,-13.32) -1.89,-13.5 -1.89,-19.08 -1.26,-19.71 2.07,-19.71 2.34,-19.98 2.34,-21.51 2.7,-21.87 v1(2.88,-21.87)
  Bottom Layer w0.25: v2(-17.589,-11.16) -17.589,-12.021 -16.65,-12.96 -8.01,-12.96 -7.65,-12.6 -2.79,-12.6 v1(-2.07,-13.32) ; v1(2.88,-21.87) 2.885,-21.865 R7.1
T-CE: U2.37 U5.5 | length 33.7
  Top Layer w0.25: U2.37 v1(-11.618,-15.022)
  Bottom Layer w0.25: v1(-11.618,-15.022) -11.618,-14.138 -11.43,-13.95 -3.504,-13.95 -2.575,-14.879 -2.575,-15.797 -2.52,-15.852 -2.52,-16.008 -2.575,-16.063 -2.575,-17.348 -2.537,-17.387 -2.61,-17.46 -1.26,-18.81 -1.26,-31.14 -1.815,-31.695 U5.5
T-I/O: U2.38 U5.6 | length 30.1
  Top Layer w0.25: U2.38 -11.128,-14.522 v1(-11.07,-14.58)
  Bottom Layer w0.25: v1(-11.07,-14.58) -3.606,-14.58 -3.025,-15.161 -3.025,-17.239 -3.06,-17.274 -3.06,-17.73 -1.89,-18.9 -1.89,-30.24 -2.085,-30.435 U5.6@-5.325,-30.435
T-SCLK: U2.36 U5.7 | length 27.5
  Top Layer w0.25: U2.36 -12.198,-15.522 -11.25,-16.47 v1(-11.07,-16.47)
  Bottom Layer w0.25: v1(-11.07,-16.47) -5.22,-16.47 -4.341,-15.591 -3.759,-15.591 -3.51,-15.84 -3.51,-18 -2.43,-19.08 -2.43,-28.71 -2.875,-29.155 U5.7
VCC: "DD DC RST GND VCC.1" BZ1.1 C8.1 C10.1 C19.2 C24.2 C33.2 C34.1 CON1.5 CON1.8 R1.2 R2.2 R3.2 R5.2 U3.1 U3.6 U4.8 U5.8 | length 101.9
  Top Layer w0.254: CON1.8 7.523,-3.023
  Top Layer w0.4: -26.37,-12.55 -25.69,-12.55 -24.93,-11.79 -24.93,-8.73 -24.57,-8.37 -22.59,-8.37 -22.195,-8.765 v1(-15.557,-8.765) -7.325,-8.765 -6.39,-7.83 -4.32,-7.83 v1(-3.42,-8.73) ; v1(-5.325,-27.885) -4.86,-27.42 -4.86,-21.69 v1(-4.68,-21.51) -4.68,-20.34 -3.06,-18.72 -3.06,-14.76 -3.24,-14.58 -3.24,-12.78 -1.71,-11.25 v1(-1.426,-11.25) ; v1(1.62,-16.74) 0.743,-15.863 BZ1.1 -1.44,-13.978 -1.44,-12.753 -1.426,-12.739 v1(-1.426,-11.25) ; 7.523,-3.023 8.82,-3.023 ; v1(9.907,-2.875) 9.759,-3.023 8.82,-3.023 ; v1(-1.426,-11.25) v1(-1.426,-9) -1.426,-4.486 -0.99,-4.05 3.6,-4.05 4.433,-4.883 CON1.5 8.077,-4.883 8.82,-4.14 8.82,-3.023
  Bottom Layer w0.4: R3.2 -8.82,-21.535 ; v1(-8.935,-19.8) -8.935,-21.42 -8.82,-21.535 ; C34.1 -8.531,-27.885 v1(-5.325,-27.885) ; C33.2 -5.325,-19.76 U4.8 -7.707,-21.495 R2.2 -8.82,-21.535 ; v1(-3.42,-8.73) -1.696,-8.73 v1(-1.426,-9) ; v1(-1.44,-6.39) 0.27,-6.39 1.114,-7.234 C24.2 ; v1(-1.426,-11.25) -1.426,-11.804 -0.63,-12.6 0.1,-12.6 0.32,-12.38 U3.6 ; C19.2 1.62,-17.066 v1(1.62,-16.74) U3.1 ; C8.1 7.742,-2.875 v1(9.907,-2.875)
VDD: C4.2 C5.2 D1.1 Q2.E R9.2 U1.2 | length 17.8
  Top Layer w0.5: v1(-12.33,-3.24) -9.775,-3.24 ; v1(-9.775,-1.53) -9.775,-3.24 ; v1(-8.14,-5.23) -8.81,-5.23 -9.775,-4.264 -9.775,-3.24
  Bottom Layer w0.5: D1.1 -22.44,-3.2 C4.2 -20.244,-3.206 C5.2 -12.552,-3.206 U1.2@-12.518,-3.24
pads on no net: ANT1.1 ANT1.3 CON1.6 S1.1 S1.3 S2.3 S2.4 S3.3 S3.4 S4.3 S4.4 S5.3 S5.4 S6.3 S6.4 U2.4 U2.15 U5.1 X2.0

## Polygon pours and split planes (outlines as drawn)
GND on Bottom Layer "Top Layer-No Net" (solid, remove dead copper, pour order 4): -23.4,-29.88 -23.4,-38.79 12.96,-38.79 14.58,-37.17 13.86,-36.45 13.86,6.66 -28.08,6.66 -31.05,3.69 -29.43,2.07 -29.43,-14.94 -23.67,-14.94 -23.4,-15.21 -23.4,-29.88
GND on Top Layer "Top Layer-No Net" (solid, remove dead copper, pour order 6): -23.4,-38.444 -23.4,-15.21 -30.96,-15.21 -30.96,7.2 -31.32,7.56 -29.52,5.76 20.97,5.76 20.97,-34.38 14.76,-40.59 13.77,-39.6 -23.22,-39.6 -23.94,-39.6

## Keep-outs
Keep-Out Layer:
  circle w0.127: c-27.146,1.937 r1
  circle w0.127: c-5.346,-9.863 r1
  circle w0.127: c-27.146,-33.563 r1
  lines w0.127: -38.826,-62.223 -38.826,-19.563 ; -29.146,-38.713 12.854,-38.713 ; 12.844,-9.405 2.765,-9.405 2.765,-18.475 12.854,-18.475 12.854,-38.723 ; 12.854,-9.405 12.854,3.937 ; 12.854,-38.723 -29.146,-38.723 -29.146,3.937 12.854,3.937 ; 12.854,-38.723 12.854,3.937

## Other copper
Top Layer:
  rectangle net GND: -23.4,-30.614 -23.076,-29.206

## Silkscreen, mask and mechanical layers (free items; w line width, h text height)
Top Overlay:
  circle w0.2: c-5.346,-9.863 r1.75
  circle w0.2: c-27.146,1.937 r1.75
  circle w0.127: c-27.146,-33.563 r1.75
  rectangle: -1.495,-17.725 2.32,-16.595
  rectangle: -1.445,-12.135 2.32,-10.965
  lines w0.013: -18.482,3.112 -18.482,-8.388 8.118,-8.388
  lines w0.127: -18.487,-8.421 8.313,-8.421 8.313,3.279 -18.437,3.279 -18.478,3.238 -18.478,-8.412 ; -1.49,-8.816 -1.49,-19.909 -1.495,-19.914 2.305,-19.914 2.305,-8.831 ; -7.618,-26.919 -7.618,-21.719 -2.418,-21.719 -2.418,-26.919 -7.618,-26.919 ; -7.598,-35.86 -7.598,-30.66 -2.398,-30.66 -2.398,-35.86 -7.598,-35.86 ; -0.506,-36.05 -0.506,-30.85 4.694,-30.85 4.694,-36.05 -0.506,-36.05 ; -0.506,-27.007 -0.506,-21.807 4.694,-21.807 4.694,-27.007 -0.506,-27.007 ; 4.89,-7.608 7.43,-7.608 7.43,0.901 4.89,0.901 4.89,-7.608 ; 6.606,-36.05 6.606,-30.85 11.806,-30.85 11.806,-36.05 6.606,-36.05 ; 6.606,-27.007 6.606,-21.807 11.806,-21.807 11.806,-27.007 6.606,-27.007
  text "DOWN LOAD" at -24.39,-2.97 h0.7 r270
  text "+" at -1.818,-10.532 h0.8 r90
  text "+" at -1.818,-15.752 h0.8 r90
  text "PISCES-BT100 V1.0" at -21.96,-42.03 h1
  text "2016/10/28" at -20.88,-43.47 h1.2
Bottom Overlay:
  circle w0.2: c6.154,-33.563 r2
  circle w0.2: c-27.146,1.937 r2
  circle w0.2: c-27.146,-33.563 r2
  circle w0.2: c-10.146,-33.563 r2
  circle w0.127: c-5.346,-9.863 r2.5
  rectangle: -6.805,-0.369 -5.625,3.187
  rectangle: -16.475,-0.42 -15.245,3.187
  lines w0.127: -20.129,1.933 -18.859,1.933 ; -19.457,1.298 -19.457,2.568 ; -10.752,1.62 -9.482,1.62 ; -10.08,0.985 -10.08,2.255 ; -18.63,-0.369 -18.63,3.238 -13.093,3.238 -13.093,-0.369 -18.63,-0.369 ; -9.083,-0.369 -9.083,3.187 -3.546,3.187 -3.546,-0.369 -9.083,-0.369
Mechanical 1:
  lines w0.127: -38.826,-62.223 -38.826,-19.563 ; -29.146,-38.713 12.854,-38.713 ; 12.854,-38.723 -29.146,-38.723 -29.146,3.937 12.854,3.937 ; 12.854,-38.723 12.854,-18.475 2.765,-18.475 2.765,-9.405 12.854,-9.405 12.854,3.937 ; 12.854,-38.723 12.854,3.937

## Text inside footprints (layer, text, board x,y; h text height)
CON1: Top Overlay "14" at 7.557,1.155 h0.8 r90; Top Overlay "1" at 7.811,-8.116 h0.8 r90